# Altium PCB Thermal_imager(Down).PcbDoc
Units mil, origin at the board's own origin, x right, y up, seen from the top; angles counter-clockwise.
Board outline 2236.22 x 1401.57 mil, 2 copper layers (Top Layer, Bottom Layer); 29 components, 21 nets, 111 pads, 121 vias.
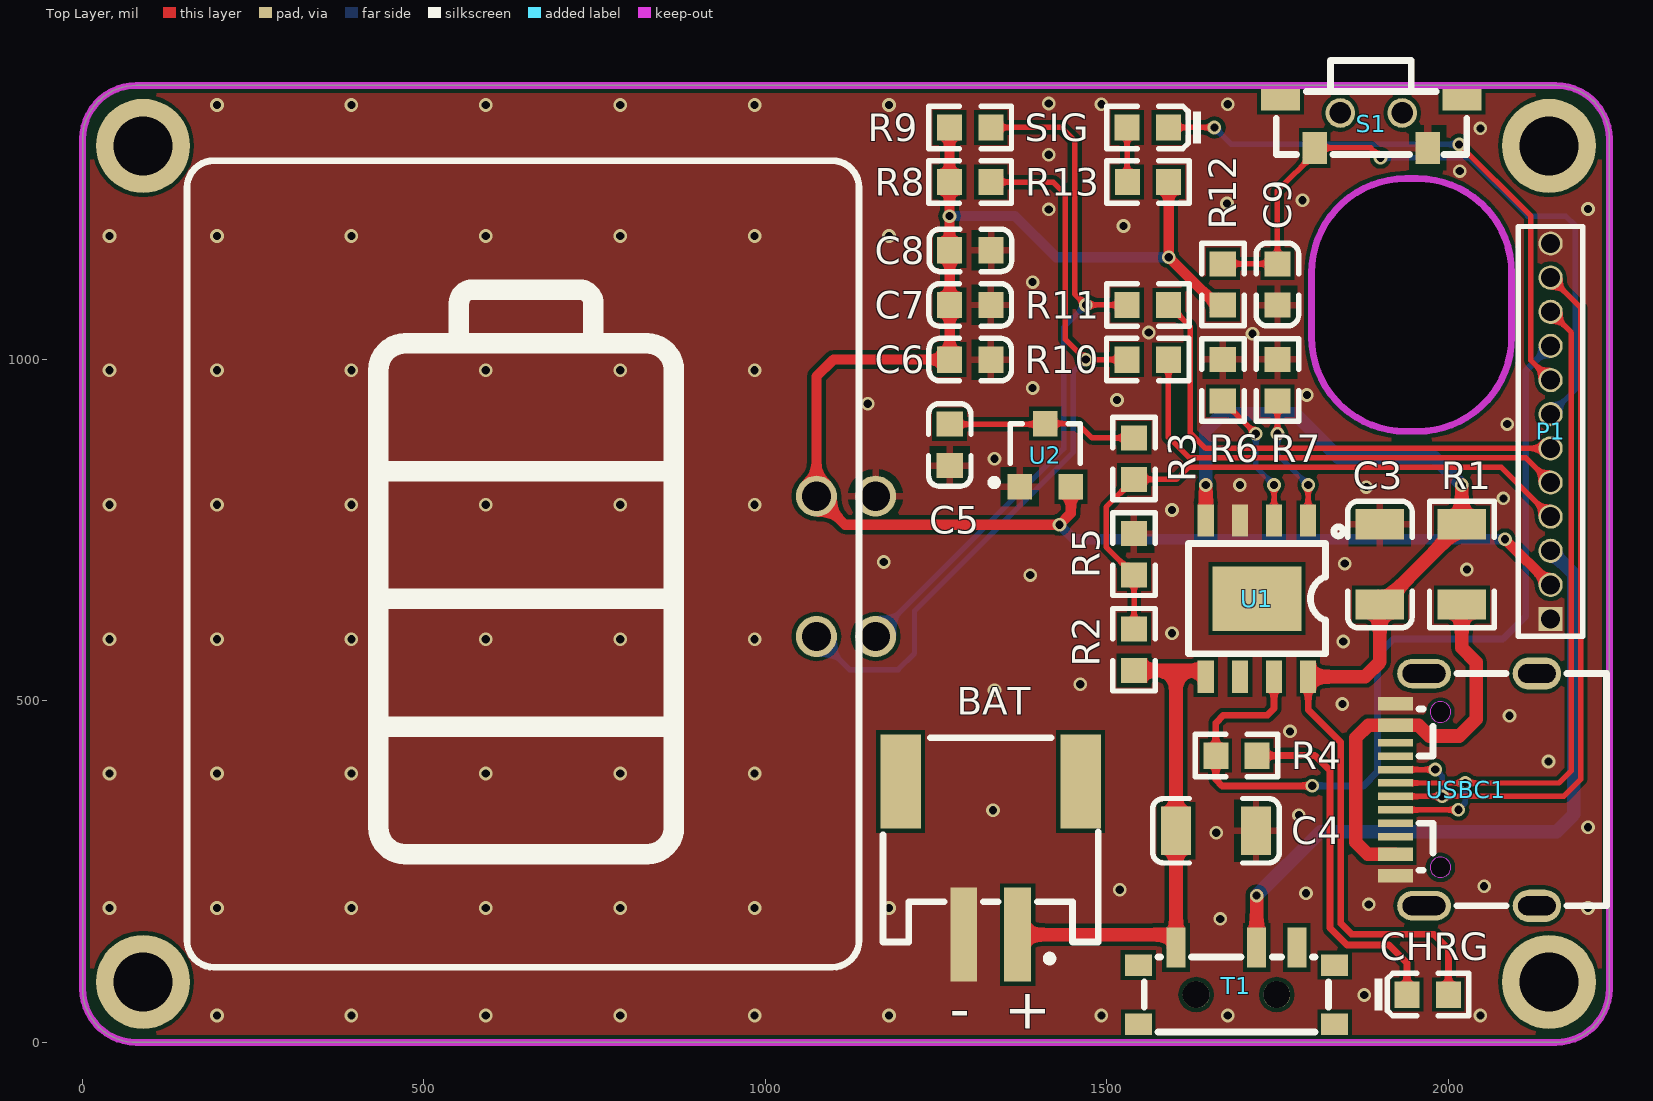
[diagram p0: Top Layer view]
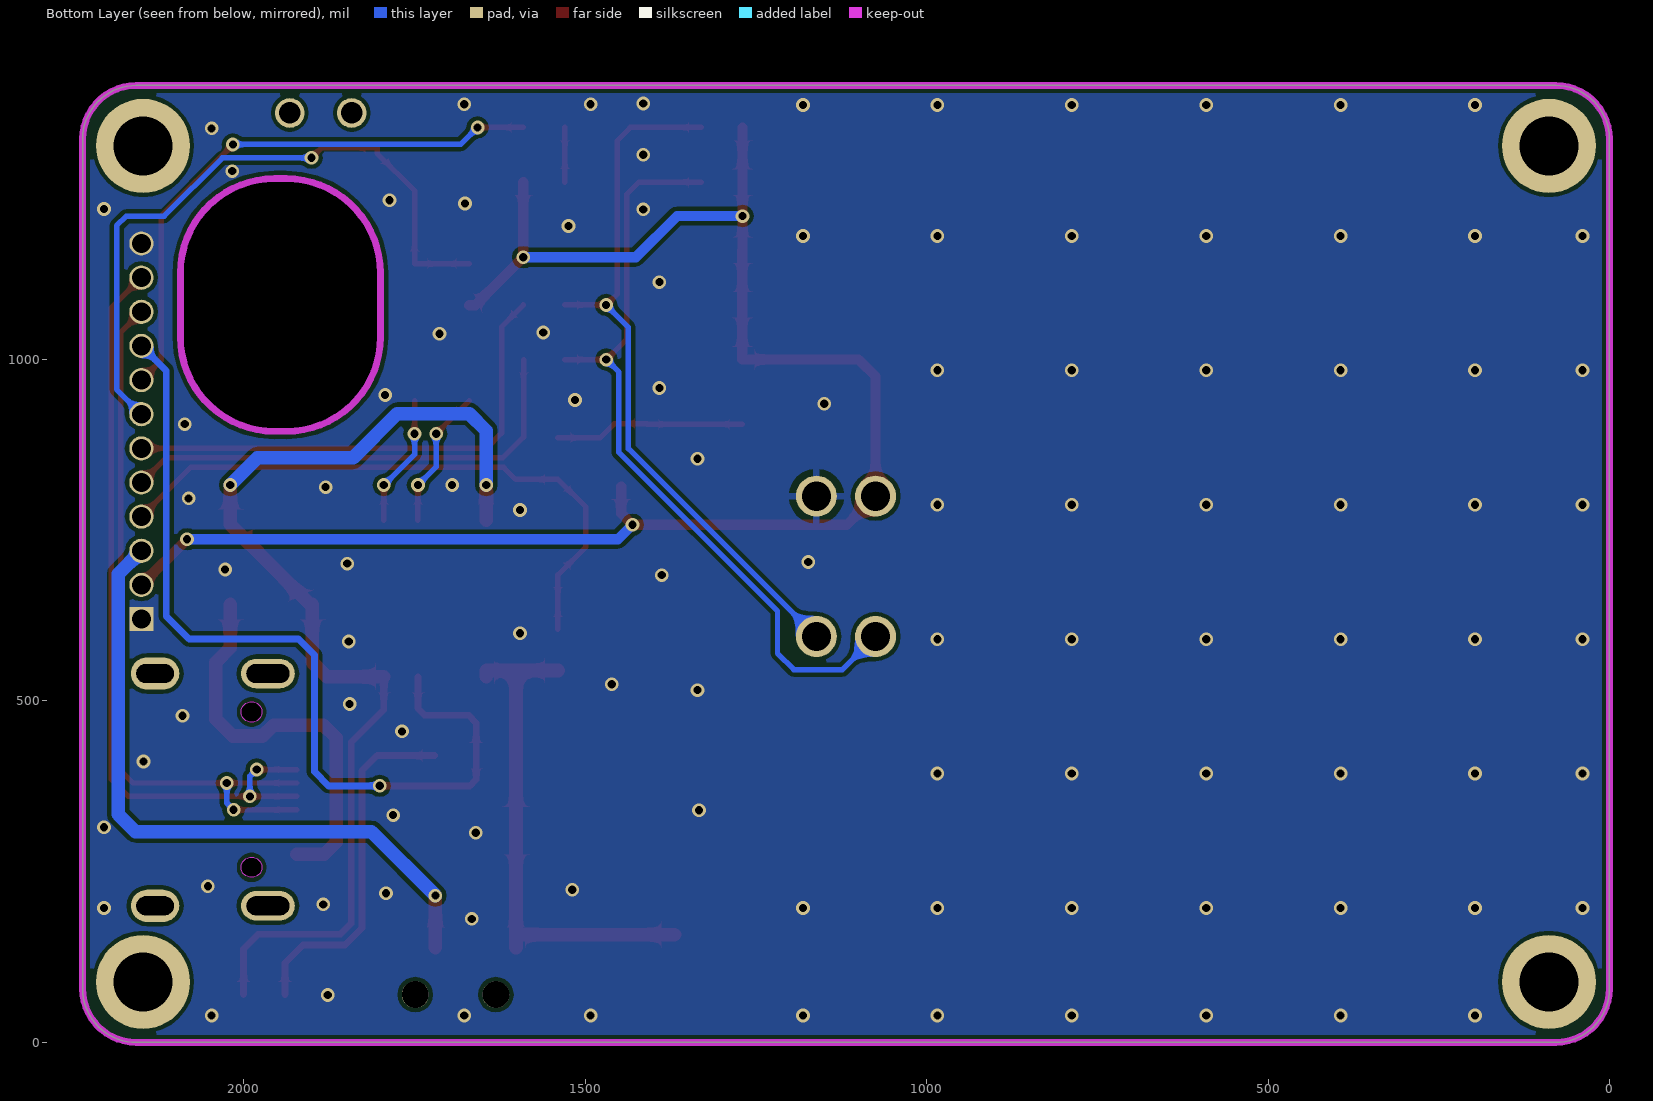
[diagram p1: Bottom Layer view, seen from below]

## Layer stack, top to bottom
Top Solder: solder mask 0.4, Solder Resist, Dk 3.5
Top Layer: signal copper 1.4
Dielectric 1: dielectric 12.6, FR-4, Dk 4.8
Bottom Layer: signal copper 1.4
Bottom Solder: solder mask 0.4, Solder Resist, Dk 3.5

## Board outline
78.74,0 cw(c78.74,78.74) 0,78.74 0,1322.83 cw(c78.74,1322.83) 78.74,1401.57 2157.48,1401.57 cw(c2157.48,1322.83) 2236.22,1322.83 2236.22,78.74 cw(c2157.48,78.74) 2157.48,0
cut-out: 1800,1032.58 ccw(c1937.58,1032.58) 1937.58,895 1955.2,895 ccw(c1955.2,1032.8) 2093,1032.8 2093,1127.2 ccw(c1955.2,1127.2) 1955.2,1265 1937.8,1265 ccw(c1937.8,1127.2) 1800,1127.2
cut-out: -1000,-1000 -990,-1000 -990,-990 -1000,-990

## Design rules (kind name [scope] priority, off if disabled: settings)
Clearance [All] p1: gap=6 ignorepadtopadclearanceinfootprint=TRUE except(0: Arc-SMDPad Arc-THPad Track-SMDPad Track-THPad; 5: Arc-Via Track-Via SMDPad-Via THPad-Via Via-Via)
PolygonConnect PolygonConnect_2 [HasPad('P1-1','P1-12','U1-3','BAT-2','USBC1-A1','USBC1-A12')] p1: connectstyle=Direct reliefconductorwidth=10 reliefentries=4 polygonreliefangle="90 Angle" airgapwidth=10
PolygonConnect PolygonConnect_1 [IsVia] p2: connectstyle=Direct reliefconductorwidth=10 reliefentries=4 polygonreliefangle="90 Angle" airgapwidth=10
PolygonConnect [All] p3: connectstyle=Relief reliefconductorwidth=10 reliefentries=4 polygonreliefangle="90 Angle" airgapwidth=10
RoutingVias [All] p1: holewidth=12 width=20 viastyle="Through Hole" minholewidth=12 minwidth=20 maxholewidth=28 maxwidth=50
SolderMaskExpansion [All] p1: expansion=4 istentingtop=FALSE
Width [All] p1: maxlimit=30 minlimit=6 preferedwidth=8
30 further rules are at their usual default settings.

## Components (designator, comment, footprint, x,y, rotation, side; value= is the part's Value field where it differs from the comment)
BAT "Header 2*1" COM_T_2.0_2P 1330,270 r180 top (schematic designator BAT1)
C3 "10uF" LC-1206_C 1900,700 r270 top
C4 "10uF" LC-1206_C 1660,310 r180 top
C5 "0.1uF" LC-0603_C 1270,875 r90 top
C6 "4.7uF" LC-0603_C 1300,1000 r180 top
C7 "0.1uF" LC-0603_C 1300,1080 r180 top
C8 "10nF" LC-0603_C 1300.32,1160 r180 top
C9 "Cap" LC-0603_C 1750,1110 r270 top value=0.1uF
CHRG "LED0" LC-0603_LED_S1 1970,70 r0 top
P1 "Header 12*1" HDR12X1_A-1.27mm 2150,620 r90 top
R1 "0.4R" LC-1206_R 2020,700 r270 top
R2 "4.7K" LC-0603_R 1540,575 r90 top
R3 "1K" LC-0603_R 1540,855 r90 top
R4 "1.5K" LC-0603_R 1690,420 r180 top
R5 "4.7K" LC-0603_R 1540,715 r90 top
R6 "1.2K" LC-0603_R 1670,970 r90 top
R7 "4.7K" LC-0603_R 1750,970 r90 top
R8 "4.7K" LC-0603_R 1300,1260 r0 top
R9 "4.7K" LC-0603_R 1300,1340 r0 top
R10 "120R" LC-0603_R 1560,1000 r180 top
R11 "120R" LC-0603_R 1560.31,1080 r0 top
R12 "Res1" LC-0603_R 1670,1110 r90 top value=4.7K
R13 "Res1" LC-0603_R 1560.47,1260 r180 top value=4.7K
S1 "SW-PB" KEY_3*6*3.5 1884.11,1302.95 r180 top
SIG "LED0" LC-0603_LED_S1 1560.16,1340 r180 top
T1 "Header 3*1" KEY_3*7 1690,70 r180 top
U1 "TP4056" ESOP_4056 1720,650 r180 top
U2 "BAT54S" SOT-23 1410,860 r0 top
USBC1 "TYPE-C" TYPE-C-16P 2026.3,370.1 r90 top locked

## Footprints (in the part's own frame and the unit in brackets; to place one, negate y for a bottom-side part, rotate by r counter-clockwise, add the part's x,y. Pads: shape width x height; smd on the part's side, far side on the other; paste and mask are expansions set on the pad)
COM_T_2.0_2P [mm]
  rect 1x3.5 smd: 1(-1,2.85) 2(1,2.85)
  rect 1.5x3.5 smd: 3(3.35,-2.85) 4(-3.35,-2.85)
  silkscreen extent -4,-4.48 4,3.87
ESOP_4056 [mm]
  rect 0.6x1.2 smd mask+0.051: 1(-1.905,-2.908) 2(-0.635,-2.908) 3(0.635,-2.908) 4(1.905,-2.908) 5(1.905,2.908) 6(0.635,2.908) 7(-0.635,2.908) 8(-1.905,2.908)
  rect 3.3x2.4 smd mask+0.051: 9(0,0)
  silkscreen extent -3.2,-2.67 2.55,2.05
HDR12X1_A-1.27mm [mm] "Connector; Header; 12 Position"
  rect 0.9x0.9 hole 0.7: 1(0,0)
  round 0.9 hole 0.7: 2(1.27,0) 3(2.54,0) 4(3.81,0) 5(5.08,0) 6(6.35,0) 7(7.62,0) 8(8.89,0) 9(10.16,0) 10(11.43,0) 11(12.7,0) 12(13.97,0)
  silkscreen extent -0.64,-1.2 14.6,1.2
KEY_3*6*3.5 [mm]
  rect 0.9x1.2 smd: 1(-2.182,-0.179) 2(2.018,-0.179)
  rect 1.45x0.8 smd: ""(-3.457,-1.971) ""(3.293,-1.971)
  round 1.1 hole 0.8 unplated: ""(-1.232,-1.479) ""(1.068,-1.479)
  silkscreen extent -3.64,-3.43 3.45,0.07
KEY_3*7 [mm]
  rect 0.7x1.5 smd: 1(2.25,-1.75) 2(-0.75,-1.75) 3(-2.25,-1.75)
  rect 1x0.8 smd: 4(-3.65,1.1) 5(-3.65,-1.1) 6(3.65,-1.1) 7(3.65,1.1)
  round 1 hole 1 unplated: ""(-1.5,0) ""(1.5,0)
  silkscreen extent -3.43,-1.4 3.43,1.4
LC-0603_C [mm]
  rect 0.93x0.98 smd: 1(-0.77,0) 2(0.77,0)
  silkscreen extent -1.53,-0.79 1.54,0.79, body extent -0.8,-0.4 0.8,0.4, height 0.3
LC-0603_LED_S1 [mm]
  rect 0.93x0.98 smd: 1(0.77,0) 2(-0.77,0)
  silkscreen extent -1.98,-0.79 1.54,0.79, body extent -0.8,-0.4 0.8,0.4, height 0.6
LC-0603_R [mm]
  rect 0.93x0.98 smd: 1(-0.77,0) 2(0.77,0)
  silkscreen extent -1.53,-0.79 1.54,0.79, body extent -0.85,-0.4 0.85,0.4, height 0.56
LC-1206_C [mm]
  rect 1.13x1.8 smd: 1(-1.49,0) 2(1.49,0)
  silkscreen extent -2.36,-1.2 2.35,1.2, body extent -1.6,-0.81 1.6,0.79, height 1
LC-1206_R [mm]
  rect 1.13x1.8 smd: 1(-1.49,0) 2(1.49,0)
  silkscreen extent -2.36,-1.2 2.35,1.2, body extent -1.7,-0.86 1.65,0.87, height 0.85
SOT-23 [mm]
  rect 0.9x0.95 smd: 1(-0.95,-1.175) 2(0.95,-1.175) 3(0,1.175)
  silkscreen extent -2.03,-1.14 1.3,1.18, body extent -1.7,-0.8 1.7,0.8, height 1.5
TYPE-C-16P [mil]
  oval 47.2x70.9 hole 27.6 slot 55.1 at 90 deg mask+2: 0(-170.1,-103.7) 0(170.1,-103.7)
  oval 43.3x78.7 hole 27.6 slot 63 at 90 deg mask+2: 0(-170.1,61.6) 0(170.1,61.6)
  rect 19.7x51.2 smd mask+2: A1(-126,103.7) A4(-94.5,103.7) A9(94.5,103.7) A12(126,103.7)
  rect 11x51.2 smd mask+2: A5(-49.2,103.7) A6(-9.8,103.7) A7(9.8,103.7) A8(49.2,103.7) B5(68.9,103.7) B6(29.5,103.7) B7(-29.5,103.7) B8(-68.9,103.7)
  Keep-Out Layer board cut-out: 128.6,37.6 128.6,40.54 126.35,45.98 122.18,50.15 116.74,52.4 110.86,52.4 105.42,50.15 101.25,45.98 99,40.54 99,37.6 99,34.66 101.25,29.22 105.42,25.05 110.86,22.8 116.74,22.8 122.18,25.05 126.35,29.22 128.6,34.66 128.6,37.6 128.6,37.6
  Keep-Out Layer board cut-out: -99,37.6 -99,40.54 -101.25,45.98 -105.42,50.15 -110.86,52.4 -116.74,52.4 -122.18,50.15 -126.35,45.98 -128.6,40.54 -128.6,37.6 -128.6,34.66 -126.35,29.22 -122.18,25.05 -116.74,22.8 -110.86,22.8 -105.42,25.05 -101.25,29.22 -99,34.66 -99,37.6 -99,37.6
  silkscreen extent -170,-205 170,69

## Part data
BAT P1 T1: "接插件", LatestRevisionDate=17-Jul-2002, LatestRevisionNote="Re-released for DXP Platform.", Publisher="Altium Limited"
C3 C4 C5 C6 C7 C8: library part Cap, "无极性电容", LatestRevisionDate=17-Jul-2002, LatestRevisionNote="Re-released for DXP Platform.", PackageReference=RAD-0.3, Published=8-Jun-2000, Publisher="Altium Limited"
C9: "无极性电容", LatestRevisionDate=17-Jul-2002, LatestRevisionNote="Re-released for DXP Platform.", PackageReference=RAD-0.3, Published=8-Jun-2000, Publisher="Altium Limited"
CHRG SIG: "发光二极管", LatestRevisionDate=08-Jul-2005, LatestRevisionNote="Mech Layer 1 removed.", PackageReference=LED-0, Published=8-Jun-2000, Publisher="Altium Limited"
R1 R2 R3 R4 R5 R6 R7 R8 R9 R10 R11: library part Res1, "贴片电阻", LatestRevisionDate=17-Jul-2002, LatestRevisionNote="Re-released for DXP Platform.", PackageReference=AXIAL-0.4, Published=8-Jun-2000, Publisher="Altium Limited"
R12 R13: "贴片电阻", LatestRevisionDate=17-Jul-2002, LatestRevisionNote="Re-released for DXP Platform.", PackageReference=AXIAL-0.4, Published=8-Jun-2000, Publisher="Altium Limited"
S1: "微动开关", LatestRevisionDate=17-Jul-2002, LatestRevisionNote="Re-released for DXP Platform.", PackageReference=SPST-2, Published=24-Mar-1999, Publisher="Altium Limited"
U1: "锂电池充电管理"
U2: "肖特基二极管"
USBC1: Current Rating - Power (Max)=3A, JLCPCB Part Class="Extended Part", LCSC Part Name="Type-C 母座", Manufacturer=精拓金, Manufacturer Part=918-418K2023S40001, Add into BOM=yes, Connector Type=Type-C, Convert to PCB=yes, Datasheet=https://atta.szlcsc.com/upload/public/pdf/source/20210305/C167321_3BB79E85CEB6874BF587E64926D16F83.pdf, Device=918-418K2023S40001, Gender=母座, Name=918-418K2023S40001, Number of Contacts=16, Number of Ports=1, Standard=-, Supplier=LCSC, Supplier Footprint=SMD, Supplier Part=C167321, Symbol=USB3.1C16PFSMT

## Free pads (board coordinates)
  round 137.8 hole 86.61: 2(88.58,88.58) 2(88.58,1312.99) 2(2147.64,88.58) 2(2147.64,1312.99)
  round 60 hole 42.77: 5(1074.82,800) 8(1161.44,800) 9(1074.82,594.46) 10(1161.44,594.46)

## Via types
v1: diameter 20, hole 12, Top Layer to Bottom Layer, tented both sides, 121 vias

## Nets (pads, with @x,y where several pads share a name; then routed paths per layer and width w, separated by ;. In a path a pad name is that pad's centre, name@x,y a point inside that pad or via, vN(x,y) a via of type N, cw(c..) or ccw(c..) an arc to the next point about the centre after c; other vN are vias at no path point)
3.3V: C6.2 C7.2 C8.2 P1.2 pad.5 R8.1 R9.1 R12.1 R13.1 U2.2 | length 2469.5
  Top Layer w15: pad.5 1116.71,758.11 v1(1430.81,758.11) 1447.4,774.7 U2.2 ; pad.5@1074.82,807.05 1074.82,975.16 1099.66,1000 C6.2 1270,1000.32 C8.2 1269.69,1160.31 v1(1269.69,1210.16) R8.1 R9.1 ; R13.1 v1(1590.79,1149.92) 1661.02,1079.69 R12.1 ; v1(2083.15,736.85) P1.2
  Bottom Layer w15: v1(1269.69,1210.16) 1365.66,1210.16 1425.9,1149.92 v1(1590.79,1149.92) ; v1(1430.81,758.11) 1452.07,736.85 v1(2083.15,736.85)
BAT: BAT.1 C4.2 R2.1 T1.1 U1.5 | length 751.9
  Top Layer w20: BAT.1 T1.1@1601.34,157.8 ; R2.1 1601.34,544.69 ; T1.1@1601.34,138.9 T1.1@1601.34,157.8 ; U1.5 1645,544.69 1601.34,544.69 ; T1.1@1601.34,157.8 C4.2 1601.34,544.69
BAT_ADC: P1.4 R2.2 R3.1 R5.1 | length 900.2
  Top Layer w8: R2.2 R5.1 1499.12,725.57 1499.12,783.8 R3.1 1602.18,824.69 1619.49,842 2078,842 P1.4
BAT_OUT: P1.3 T1.2 | length 989.9
  Top Layer w20: T1.2 v1(1719.53,214.94)
  Bottom Layer w20: v1(1719.53,214.94) 1813.17,308.58 2158.6,308.58 2183.93,333.91 2183.93,686.07 P1.3
CHRG_GPIO: P1.9 R4.2 U1.7 | length 1295.2
  Top Layer w10: U1.7 1745,488.85 1735.34,479.19 1670.8,479.19 1659.68,468.08 R4.2 1659.68,385.09 1669.04,375.73 v1(1801.05,375.73)
  Bottom Layer w10: v1(1801.05,375.73) 1875.86,375.73 1896.58,396.45 1896.58,567.28 1919.89,590.59 2079.99,590.59 2113.77,624.37 2113.77,983.77 P1.9
GND: BAT.2 C3.1 C4.1 C5.1 C6.1 C7.1 C8.1 C9.2 P1.1 P1.12 pad.8 R5.2 R6.2 R7.2 S1.1 U1.3 U2.1 USBC1.A1 USBC1.A12
  other v1: 196.85,39.37 393.7,39.37 590.55,39.37 787.4,39.37 984.25,39.37 1181.1,39.37 1492.13,39.37 1677.16,39.37 2047.24,39.37 1877.11,69.45 1666.36,180.88 39.37,196.85 196.85,196.85 393.7,196.85 590.55,196.85 787.4,196.85 984.25,196.85 1181.1,196.85 2204.72,196.85 1883.77,202.07 1791.72,218.42 1518.91,223.55 2052.72,228.72 1660.27,307.16 2204.72,314.96 1781.42,332.88 1333.38,339.95 39.37,393.7 196.85,393.7 393.7,393.7 590.55,393.7 787.4,393.7 984.25,393.7 2147.01,411.35 1768.47,455.51 2089.96,478.41 1845.07,495.48 1335.53,515.89 1461.05,524.48 1846.22,587.22 39.37,590.55 196.85,590.55 393.7,590.55 590.55,590.55 787.4,590.55 984.25,590.55 1595.51,599.34 1388.09,684.33 2027.44,692.53 1848.63,701.17 1173.53,703.64 1595.51,779.8 39.37,787.4 196.85,787.4 393.7,787.4 590.55,787.4 787.4,787.4 984.25,787.4 2080.95,796.72 1880.26,813.24 1695,816.33 1335.53,854.9 2086.61,905.51 1149.93,935.37 1514.97,940.88 1793.13,948.23 1391.44,958.45 39.37,984.25 196.85,984.25 393.7,984.25 590.55,984.25 787.4,984.25 984.25,984.25 1713.37,1037.78 1561.59,1039.7 1391.44,1113.47 39.37,1181.1 196.85,1181.1 393.7,1181.1 590.55,1181.1 787.4,1181.1 984.25,1181.1 1181.1,1181.1 1524.48,1195.62 1415,1220 2204.72,1220.47 1676.01,1228.66 1786.76,1233.5 2017,1276 1415,1300 2047.24,1338.58 196.85,1372.95 393.7,1372.95 590.55,1372.95 787.4,1372.95 984.25,1372.95 1181.1,1372.95 1492.13,1373.95 1677.16,1373.95 1415,1375
IIC_SCL: P1.6 R11.2 | length 737.6
  Top Layer w8: R11.2 1622.54,1048.09 1622.54,892.36 1644.9,870 P1.6
IIC_SDA: P1.5 R10.1 | length 700.7
  Top Layer w8: R10.1 1590.31,886.59 1620.9,856 2114,856 P1.5
KEY_GPIO: C9.1 P1.7 R12.2 S1.2 | length 992.2
  Top Layer w8: R12.2 C9.1 1750,1247.34 1804.64,1301.99 S1.2 1886.46,1310 v1(1900.97,1295.49)
  Bottom Layer w8: v1(1900.97,1295.49) 2031.42,1295.49 2116.71,1210.2 2172.1,1210.2 2186.25,1196.04 2186.25,956.25 P1.7
LED_GPIO: P1.8 SIG.2 | length 836.3
  Top Layer w8: SIG.2 v1(1657.67,1340) ; v1(2016.02,1315.04) 2121,1210.06 2121,999 P1.8
  Bottom Layer w8: v1(1657.67,1340) 1682.44,1315.23 v1@2016.02,1315.23
NetC3_2: C3.2 CHRG.1 R1.1 U1.4 U1.8 | length 1605.5
  Top Layer w10: U1.8 1795,487.23 1842.77,439.46 1842.77,173.98 1858.27,158.48 1978.7,158.48 2000.32,136.86 CHRG.1
  Top Layer w20: U1.4 v1(1645,816.33) ; U1.8 1878.25,535.5 1900,557.25 C3.2 1902.68,641.34 R1.1 v1(2020,816.33)
  Bottom Layer w20: v1(1645,816.33) 1645,895.89 1670.04,920.93 1775.23,920.93 1840.1,856.05 1980.28,856.05 v1(2020,816.33)
NetC5_2: C5.2 R3.2 U2.3 | length 279.1
  Top Layer w8: C5.2 1409.05,905.32 U2.3 1457.47,906.26 1478.41,885.32 R3.2
NetCHRG_2: CHRG.2 R4.1 | length 526.4
  Top Layer w10: R4.1 1804.71,420 1826.77,397.94 1826.77,167.35 1851.64,142.48 1913.27,142.48 1939.69,116.06 CHRG.2
NetR6_1: R6.1 U1.2 | length 206.3
  Top Layer w8: R6.1 v1(1718.35,891.33) ; U1.2 v1(1745,816.33)
  Bottom Layer w8: v1(1718.35,891.33) 1718.35,842.98 v1(1745,816.33)
NetR7_1: R7.1 U1.1 | length 193.8
  Top Layer w8: v1(1750,891.33) R7.1 ; U1.1 v1(1795,816.33)
  Bottom Layer w8: v1(1750,891.33) 1750,861.33 v1(1795,816.33)
NetR8_2: pad.9 R8.2 R10.2 | length 1139
  Top Layer w8: R8.2 1421.46,1260 1439.05,1242.41 1439.05,1030.09 v1(1469.14,1000) R10.2
  Bottom Layer w8: pad.9 1123.31,545.97 1194.54,545.97 1218.46,569.89 1218.46,631.68 1450.71,863.93 1450.71,981.57 v1(1469.14,1000)
NetR9_2: pad.10 R9.2 R11.1 | length 1051.9
  Top Layer w8: R9.2 1433.82,1340 1453.05,1320.78 1453.05,1096.41 v1(1469.45,1080) R11.1
  Bottom Layer w8: pad.10 1436.71,869.73 1436.71,1047.25 v1(1469.45,1080)
NetR13_2: R13.2 SIG.1 | length 80.1
  Top Layer w8: SIG.1 1529.84,1260.32 R13.2
USB_D+: P1.11 USBC1.A6 USBC1.B6 | length 1137.2
  Top Layer w8: USBC1.A6 v1(1991.19,360.3) 2169.11,360.3 2194.52,385.71 2194.52,1075.48 P1.11 ; USBC1.B6 v1(1981.19,399.6)
  Bottom Layer w8: v1(1981.19,399.6) 1991.19,389.6 v1(1991.19,360.3)
USB_D-: P1.10 USBC1.A7 USBC1.B7 | length 1085.8
  Top Layer w8: USBC1.B7 v1(2014.98,340.6) ; USBC1.A7 v1(2024.98,379.9) 2162.29,379.9 2180.52,398.13 2180.52,1039.48 P1.10
  Bottom Layer w8: v1(2014.98,340.6) 2024.98,350.6 v1(2024.98,379.9)
VCC_IN: R1.2 USBC1.A4 USBC1.A9 | length 595.5
  Top Layer w20: USBC1.A4 1882.18,275.6 1864.81,292.97 1864.81,446.14 1883.27,464.6 USBC1.A9 1956.63,464.6 1972.56,448.67 2016.29,448.67 2040.99,473.38 2040.99,556.88 2020,577.87 R1.2
pads on no net: BAT.3 BAT.4 S1. T1. T1.3 T1.4 T1.5 T1.6 T1.7 U1.6 U1.9 USBC1.0 USBC1.A5 USBC1.A8 USBC1.B5 USBC1.B8

## Polygon pours and split planes (outlines as drawn)
GND on Bottom Layer "Top Layer-No Net" (solid, remove dead copper, pour order 6): 0,0 2236.22,0 2236.22,1401.57 0,1401.57
GND on Top Layer "Top Layer-No Net" (solid, remove dead copper, pour order 4): 0,0 2236.22,0 2236.22,1401.57 0,1401.57

## Keep-outs
Keep-Out Layer:
  lines w10: 1954.99,895 1937.58,895 cw(c1937.58,1032.58) 1800,1032.58 1800,1127.2 cw(c1937.8,1127.2) 1937.8,1265 1955.2,1265 cw(c1955.2,1127.2) 2093,1127.2 2093,1032.8 cw(c1955.2,1032.8) 1955.2,895 ; 0,78.74 ccw(c78.74,78.74) 78.74,0 2157.48,0 ccw(c2157.48,78.74) 2236.22,78.74 2236.22,1322.83 ccw(c2157.48,1322.83) 2157.48,1401.57 78.74,1401.57 ccw(c78.74,1322.83) 0,1322.83 0,78.74

## Silkscreen, mask and mechanical layers (free items; w line width, h text height)
Top Overlay:
  lines w10: 152.95,149.53 ccw(c192.32,149.53) 192.32,110.16 1097.83,110.16 ccw(c1097.83,149.53) 1137.2,149.53 1137.2,1251.89 ccw(c1097.83,1251.89) 1097.83,1291.26 192.32,1291.26 ccw(c192.32,1251.89) 152.95,1251.89 152.95,149.53
  lines w30: 433.07,462.6 866.14,462.6 ; 433.07,649.61 866.14,649.61 ; 433.07,836.61 866.14,836.61 ; 551.18,1023.62 472.44,1023.62 ccw(c472.44,984.25) 433.07,984.25 433.07,314.96 ccw(c472.44,314.96) 472.44,275.59 826.77,275.59 ccw(c826.77,314.96) 866.14,314.96 866.14,984.25 ccw(c826.77,984.25) 826.77,1023.62 748.03,1023.62 ; 551.18,1023.62 551.18,1082.68 cw(c570.87,1082.68) 570.87,1102.36 728.35,1102.36 cw(c728.35,1082.68) 748.03,1082.68 748.03,1023.62 ; 551.18,1023.62 748.03,1023.62
  text "-" at 1270,20 h60
  text "+" at 1350,20 h60
Mechanical 5:
  rectangle: 250,1150 300,1250